# Altium PCB HS-IO TopBoard.PcbDoc
Units mm, origin at the board's own origin, x right, y up, seen from the top; angles counter-clockwise.
Board outline 158.83 x 62.32 mm, 6 copper layers (Top Layer, Int1 (GND), Int2 (Sign), Int3 (Sign), Int4 (PWR), Bottom Layer), stack 1.551 mm thick; 29 components, 22 nets, 112 pads, 34 vias.
Unrouted connection lines stored in the file: 38.
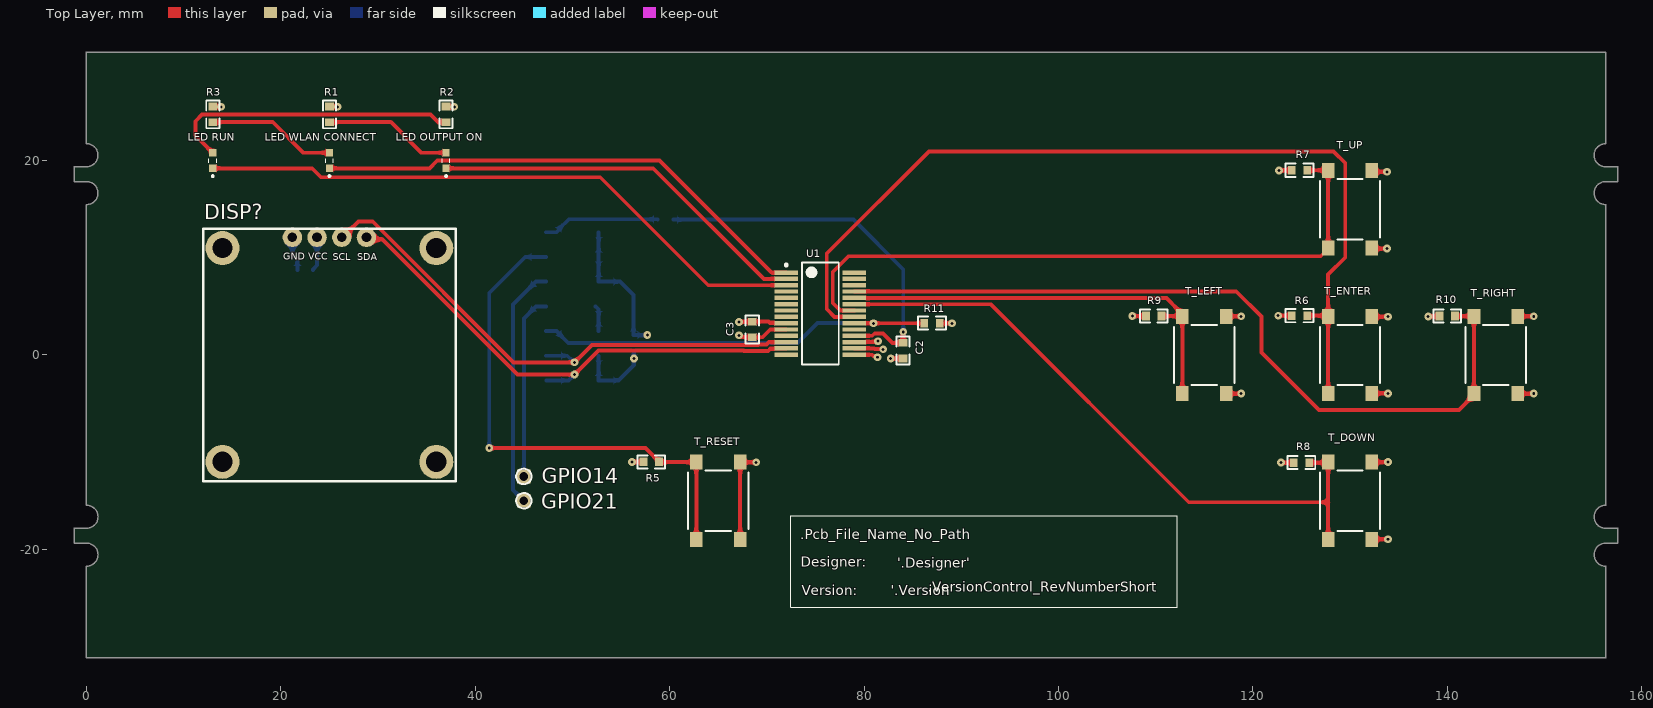
[diagram p0: Top Layer view]
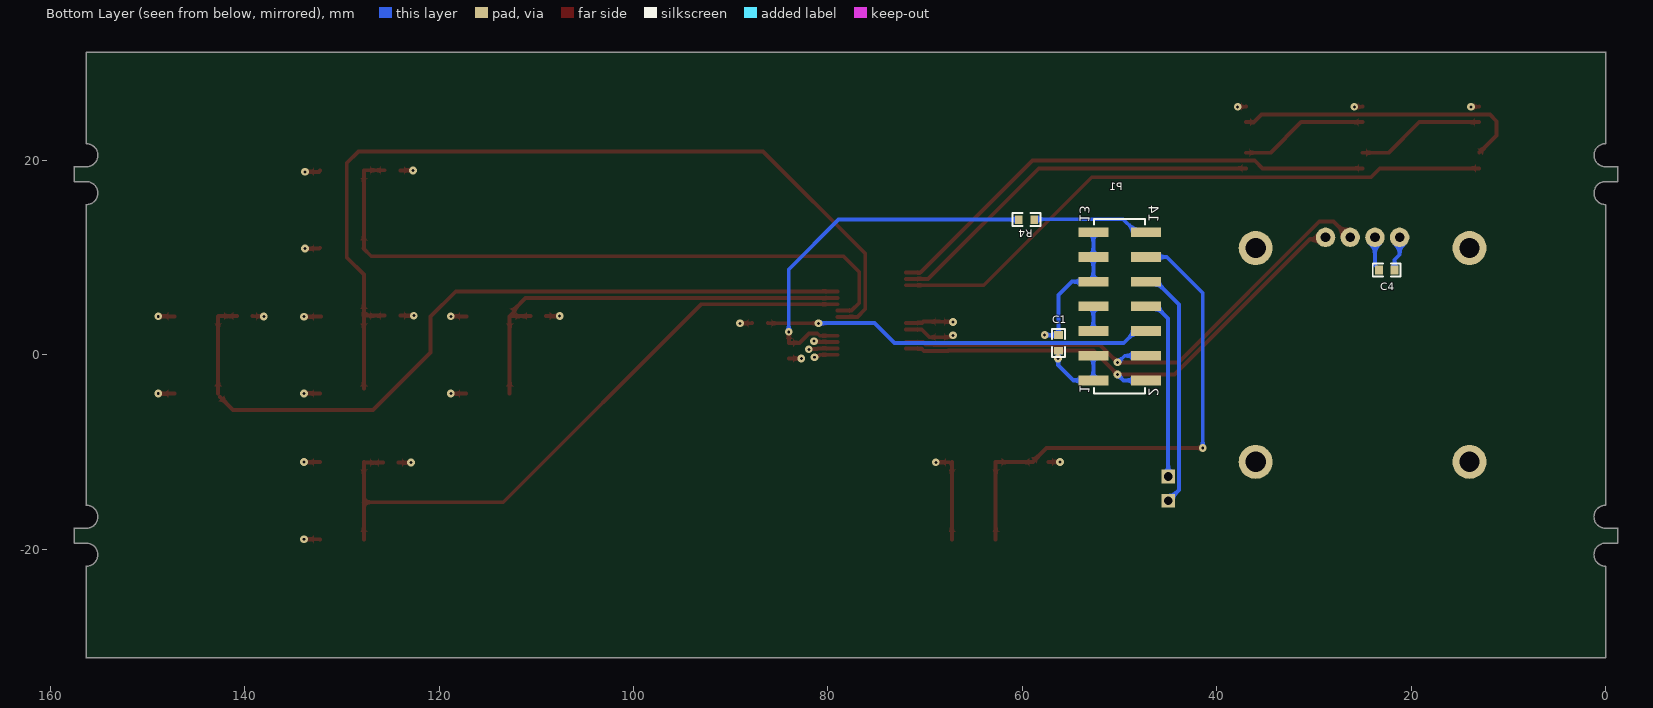
[diagram p1: Bottom Layer view, seen from below]
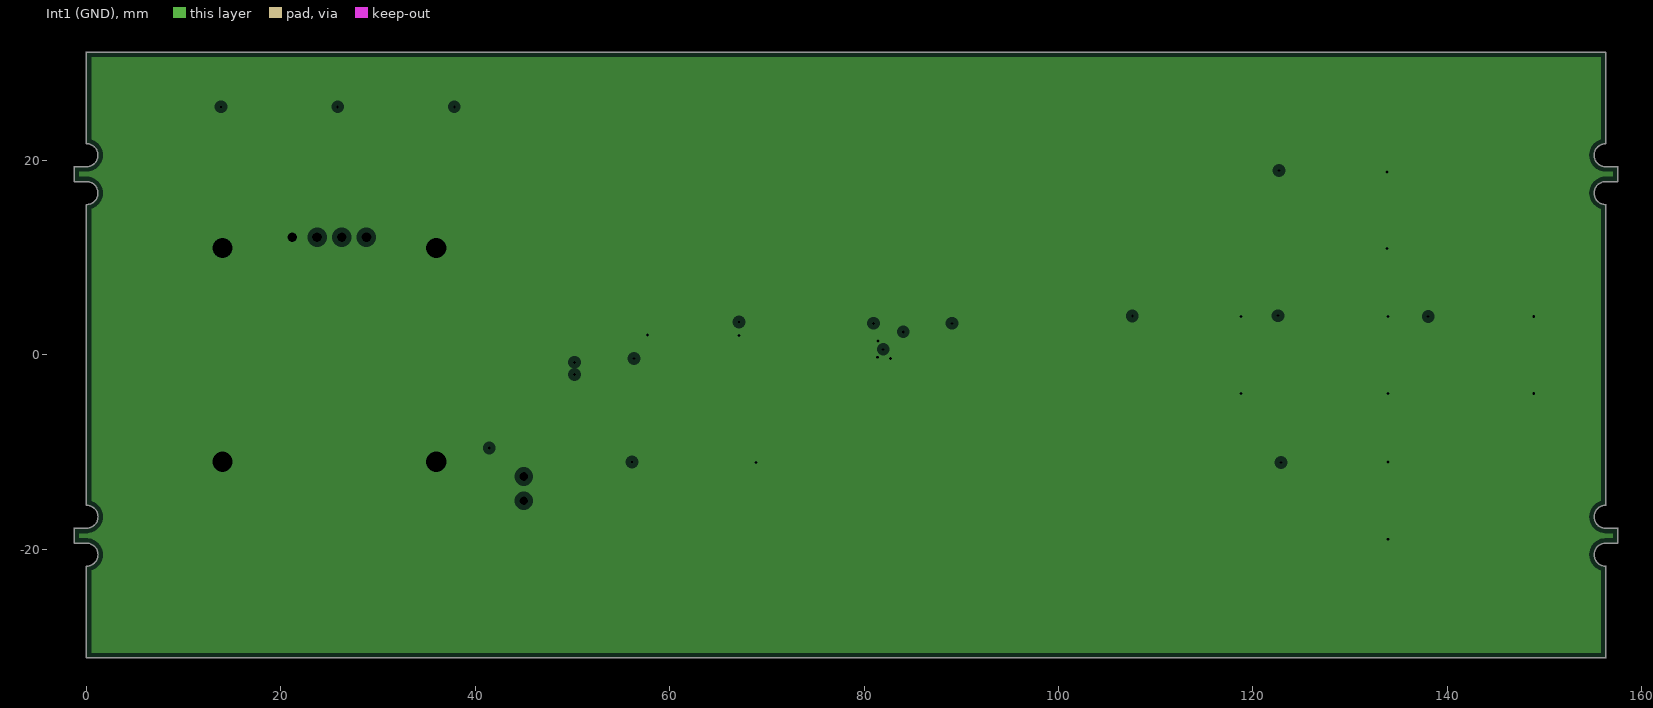
[diagram p2: Int1 (GND), clearances drawn from the general rule]
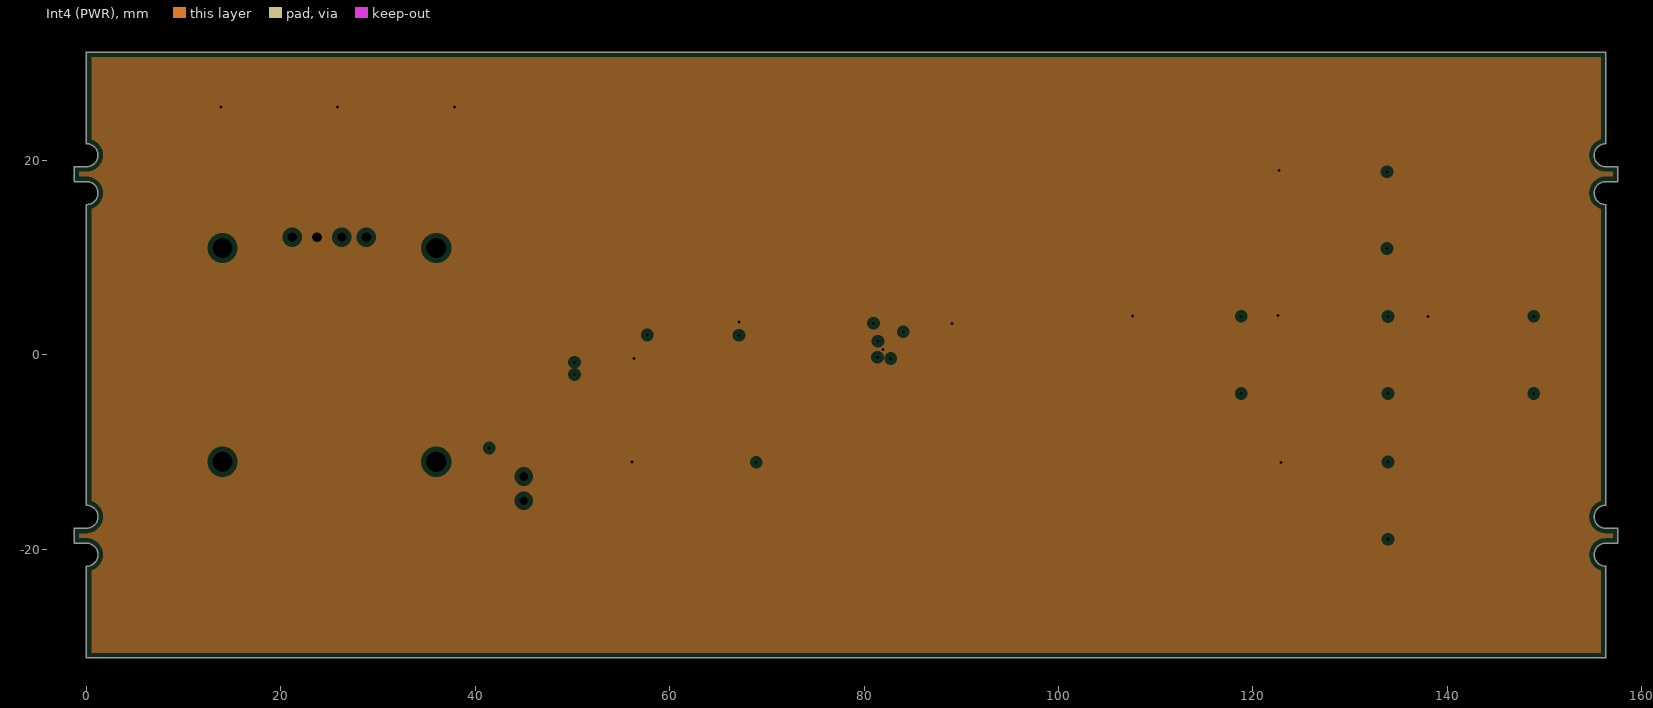
[diagram p3: Int4 (PWR), clearances drawn from the general rule]

## Layer stack, top to bottom
Top Solder: solder mask 0.0254, SM-001, Dk 4
Top Layer: signal copper 0.035
Dielectric 1: prepreg 0.0711, PP-006, Dk 4.1
Dielectric 2: prepreg 0.0711, PP-006, Dk 4.1
Int1 (GND): plane copper 0.035, net Gnd
Dielectric 3: core 0.4572, Core-035, Dk 4.7
Int2 (Sign): signal copper 0.035
Dielectric 4: prepreg 0.0711, PP-006, Dk 4.1
Dielectric 5: prepreg 0.0711, PP-006, Dk 4.1
Int3 (Sign): signal copper 0.035
Dielectric 6: core 0.4572, Core-035, Dk 4.7
Int4 (PWR): plane copper 0.035, net 3V3p
Dielectric 7: prepreg 0.0711, PP-006, Dk 4.1
Dielectric 8: prepreg 0.0711, PP-006, Dk 4.1
Bottom Layer: signal copper 0.035
Bottom Solder: solder mask 0.0254, SM-001, Dk 4

## Board outline
-1.262,-19.359 0.006,-19.359 cw(c0.006,-20.547) 1.194,-20.547 cw(c0.006,-20.547) 0.006,-21.735 0,-21.741 0,-31.158 0.011,-31.159 31.22,-31.159 31.225,-31.164 156.305,-31.164 156.311,-31.158 156.311,-21.743 156.304,-21.735 cw(c156.306,-20.547) 156.306,-19.359 157.556,-19.359 157.561,-19.352 157.561,-17.843 157.554,-17.835 156.306,-17.835 cw(c156.306,-16.647) 156.305,-15.459 156.311,-15.452 156.311,15.457 156.304,15.465 cw(c156.306,16.653) 156.306,17.841 157.556,17.841 157.561,17.848 157.561,19.357 157.554,19.365 156.306,19.365 cw(c156.306,20.553) 156.306,21.741 156.311,21.753 156.311,31.147 156.299,31.152 78.154,31.155 78.144,31.155 0.005,31.158 0,31.141 0,21.764 -0.001,21.741 cw(c-0.001,20.553) 1.187,20.553 cw(c-0.001,20.553) -0.001,19.365 -1.261,19.365 -1.268,19.36 -1.268,17.847 -1.262,17.841 -0.001,17.841 cw(c-0.001,16.653) 1.187,16.653 cw(c-0.001,16.653) -0.001,15.465 0,15.453 0,-15.447 0.006,-15.459 cw(c0.006,-16.647) 1.194,-16.647 cw(c0.006,-16.647) 0.006,-17.835 -1.261,-17.835 -1.268,-17.84

## Design rules (kind name [scope] priority, off if disabled: settings)
BoardOutlineClearance [All] p1: gap=2 ignorepadtopadclearanceinfootprint=FALSE
Clearance Small_Clearance [WithinRoom('J300_Small_Clearance')] p1: gap=0.12 ignorepadtopadclearanceinfootprint=FALSE
Clearance [All] p2: gap=0.2 ignorepadtopadclearanceinfootprint=TRUE except(0: SMDPad-Hole THPad-Hole Via-Hole Text-Hole; 0.3: Arc-Hole Track-Hole THPad-THPad THPad-Via THPad-Fill THPad-Poly THPad-Region THPad-Text Fill-Hole Poly-Hole Region-Hole)
Clearance "Clearance_Vias im Messpunkten zulassen" [(InComponent('3V3A') OR InComponent('3V3D') OR InComponent('GND') OR InComponent('UREF_I') OR InComponent('UREF_U') OR InComponent('5V')) vs IsVia] p3: gap=0 ignorepadtopadclearanceinfootprint=FALSE
Clearance "Clearance_Vias im Thermal-Pads von U1 (Concerto) zulassen" [IsVia vs InPadClass('Thermal Pads of U1 (Concerto)')] p4: gap=0 ignorepadtopadclearanceinfootprint=FALSE
Clearance "Clearance_Minimum Distance Via to Pad" [IsVia vs IsSMTPin] p5: gap=0 ignorepadtopadclearanceinfootprint=FALSE // to avoid solder wicking (Lötzinn darf nicht im Via-Bohrung abfließen)
ComponentClearance ComponentClearance_LCD-Folienleiter [(InComponent('LCD1000') AND InComponent('D200') AND InComponent('D200') AND InComponent('L200') AND InComponent('FB200') AND InComponent('FB201') AND InComponent('FB202') AND InComponent('C190') AND InComponent('U1900'))] p1: gap=-20 collisioncheckmode=3 verticalgap=0.254 showdistances=FALSE // Unter dem Foilenleiter der LCD platzierte Bauteile
ComponentClearance "ComponentClearance_Prozessor zu NetTies" [(InComponent('NT1') AND InComponent('NT2') AND InComponent('NT3')) vs InComponent('U400')] p2: gap=-20 collisioncheckmode=3 verticalgap=2540 showdistances=FALSE // Unter dem Prozessor sind drei NetTies platziert
ComponentClearance "ComponentClearance_Net Ties winzig NT4" [(InComponent('LCD1000') AND InComponent('U400') AND InComponent('NT1') AND InComponent('NT2') AND InComponent('NT3') AND InComponent('NT4'))] p3: gap=0 collisioncheckmode=3 verticalgap=2540 showdistances=FALSE // Net Ties dürfen unter Bauteilen platziert werden
ComponentClearance "ComponentClearance_Net Ties winzig NT4_C408" [(InComponent('NT4') AND InComponent('C408'))] p4: gap=0 collisioncheckmode=3 verticalgap=2540 showdistances=FALSE // Net Ties dürfen unter Bauteilen platziert werden
ComponentClearance [All] p5: gap=0.1 collisioncheckmode=3 verticalgap=0.254 showdistances=FALSE
DiffPairsRouting [All] p1: maxlimit=0.3 minlimit=0.2 mostfreqgap=0.2 toplayer_minwidth=0.2 toplayer_maxwidth=0.3 toplayer_prefwidth=0.2 midlayer1_minwidth=0.2 midlayer1_maxwidth=0.3 midlayer1_prefwidth=0.2 midlayer2_minwidth=0.2 midlayer2_maxwidth=0.3 midlayer2_prefwidth=0.2 bottomlayer_minwidth=0.2 bottomlayer_maxwidth=0.3 bottomlayer_prefwidth=0.2 maxuncoupledlength=12.7
Height [All] p1: minheight=0 maxheight=20 prefheight=12.7
HoleSize Via_HoleSize [IsVia] p1: absolutevalues=TRUE maxlimit=0.6 minlimit=0.2 maxpercent=80.000 minpercent=20.000
HoleSize [All] p2: absolutevalues=TRUE maxlimit=5 minlimit=0.3 maxpercent=80.000 minpercent=20.000
MatchedLengths "MatchedLengths SD Card" [(InNet('SD CLK') OR InNet('SD D0') OR InNet('SD D1') OR InNet('SD D2') OR InNet('SD D3'))] p1: tolerance=5 checknetsindiffpair=FALSE checkdiffpairvsdiffpair=TRUE checkxsignals=TRUE checkothers=TRUE
MinimumSolderMaskSliver "MinimumSolderMaskSliver_FRAKO Logos" [(InComponent('Logo1') OR InComponent('Logo2'))] p1: minsoldermaskwidth=0 // Meldungen innerhalb der FRAKO-Logos unterdrücken
MinimumSolderMaskSliver MinimumSolderMaskSliver_U100 [InComponent('U100')] p2: minsoldermaskwidth=0.12 // Lötstoppmaske an U100: kleineren Wert zulassen
MinimumSolderMaskSliver MinimumSolderMaskSliver_U1 [InComponent('U1')] p3: minsoldermaskwidth=0.045 // Lötstoppmaske an U1: kleineren Wert zulassen
MinimumSolderMaskSliver MinimumSolderMaskSliver_U402 [InComponent('U402')] p4: minsoldermaskwidth=0.1 // Lötstoppmaske an U402: kleineren Wert zulassen
MinimumSolderMaskSliver [All] p5: minsoldermaskwidth=0.05
PlaneClearance [All] p1: clearance=0.508
PlaneConnect [All] p1: pad.planeconnectstyle=Relief pad.reliefexpansion=0.508 pad.reliefentries=4 pad.reliefconductorwidth=0.5 pad.reliefairgap=0.254 via.planeconnectstyle=Direct via.reliefexpansion=0.508 via.reliefentries=4 via.reliefconductorwidth=0.254 via.reliefairgap=0.254
PolygonConnect [All] p1: thpad.connectstyle=Relief thpad.reliefconductorwidth=0.254 thpad.reliefentries=4 thpad.polygonreliefangle="90 Angle" thpad.airgapwidth=0.254 smdpad.connectstyle=Relief smdpad.reliefconductorwidth=0.254 smdpad.reliefentries=4 smdpad.polygonreliefangle="90 Angle" smdpad.airgapwidth=0.254 via.connectstyle=Direct via.reliefconductorwidth=0.254 via.reliefentries=4 via.polygonreliefangle="90 Angle" via.airgapwidth=0.254
RoutingVias [All] p1: holewidth=0.3 width=0.6 viastyle="Through Hole" minholewidth=0.2 minwidth=0.5 maxholewidth=2 maxwidth=3.5
SilkToSilkClearance [All] p1: silktosilkclearance=0.1
SilkToSolderMaskClearance [IsPad] p1: minsilkscreentomaskgap=0 clearancetoexposedcopper=TRUE
SolderMaskExpansion [All] p1: expansion=0.102 istentingtop=FALSE
SupplyNets "Schematic Supply Nets_5" [InNet('12V')] p1: voltage=0.000
SupplyNets "Schematic Supply Nets_3" [InNet('3V3p')] p2: voltage=0.000
SupplyNets "Schematic Supply Nets_1" [InNet('GND')] p3: voltage=0.000
UnRoutedNet [All] p1: checkbadconnections=TRUE
Width [All] p1: maxlimit=3 minlimit=0.4 preferedwidth=0.4 minimp=50.000000 maximp=50.000000 favimp=50.000000
20 further rules are at their usual default settings.

## Components (designator, comment, footprint, x,y, rotation, side; value= is the part's Value field where it differs from the comment)
C1 "100n" CC1608-0603 56.286,1.241 r270 bottom
C2 "100n" CC1608-0603 84,0.447 r90 top
C3 "100n" CC1608-0603 68.503,2.622 r90 top
C4 "100n" CC1608-0603 22.503,8.747 r0 bottom
DISP? "JMD0.96-1" JMD0.96-1-Footprint-1 25,0 r0 top
GPIO14 "(no part)" TESTPOINT 45,-12.5 r90 top
GPIO21 "(no part)" TESTPOINT 45,-15 r90 top
"LED OUTPUT ON" "150060YS55040" LED_0603_Standard 37.003,19.997 r90 top locked
"LED RUN" "150060GS55040" LED_0603_Standard 13.003,19.997 r90 top locked
"LED WLAN CONNECT" "150060RS55040" LED_0603_Standard 25.003,19.997 r90 top locked
P1 "61031421121" 61031421121 50,5 r90 bottom locked
R1 "s0603_715_1%" CC1608-0603 25.003,24.747 r90 top
R2 "s0603_8k66_1%" CC1608-0603 37.003,24.747 r90 top
R3 "S0603_931_1%" CC1608-0603 13.003,24.747 r90 top
R4 "1k0" CR1608-0603 59.575,13.92 r180 bottom
R5 "4k7" CR1608-0603 58.113,-11 r180 top
R6 "4k7" CR1608-0603 124.8,4.041 r180 top
R7 "4k7" CR1608-0603 124.8,19 r180 top
R8 "4k7" CR1608-0603 125,-11.078 r180 top
R9 "4k7" CR1608-0603 109.8,4 r180 top
R10 "4k7" CR1608-0603 140,4 r180 top
R11 "4k7" CR1608-0603 87,3.272 r0 top
T_DOWN "430182050816" 430182050816 130,-15 r90 top locked
T_ENTER "430182050816" 430182050816 130,0 r90 top locked
T_LEFT "430182050816" 430182050816 115,0 r90 top locked
T_RESET "430182050816" 430182050816 65,-15 r90 top locked
T_RIGHT "430182050816" 430182050816 145,0 r90 top locked
T_UP "430182050816" 430182050816 130,15 r90 top locked
U1 "MCP23017-E/SS" SSOP-SS28_M 75.503,4.247 r0 top

## Footprints (in the part's own frame and the unit in brackets; to place one, negate y for a bottom-side part, rotate by r counter-clockwise, add the part's x,y. Pads: shape width x height; smd on the part's side, far side on the other; paste and mask are expansions set on the pad)
61031421121 [mm] "Pin Header, pitch 2.54 mm, SMD, Vertical, dual row, 14p"
  rect 1x3.1 smd: 1(-7.62,2.7) 2(-7.62,-2.7) 3(-5.08,2.7) 4(-5.08,-2.7) 5(-2.54,2.7) 6(-2.54,-2.7) 7(0,2.7) 8(0,-2.7) 9(2.54,2.7) 10(2.54,-2.7) 11(5.08,2.7) 12(5.08,-2.7) 13(7.62,2.7) 14(7.62,-2.7)
  silkscreen extent -8.96,-2.62 8.96,2.62, body extent -8.89,-3.75 8.89,3.75, height 9.62
430182050816 [mm] "SMD Tact Switch, body 6x6mm"
  rect 1.55x1.3 smd: 1(-3.975,2.25) 2(-3.975,-2.25) 3(3.975,2.25) 4(3.975,-2.25)
  silkscreen extent -3.1,-3.1 3.1,3.1, body extent -4.5,-3.1 4.5,3.1, height 5
CC1608-0603 [mm]
  rect 0.8x0.9 smd: 1(-0.8,0) 2(0.8,0)
  silkscreen extent -1.43,-0.68 1.45,0.67, body extent -0.8,-0.4 0.8,0.4, height 1
CR1608-0603 [mm]
  rect 0.8x0.9 smd: 1(-0.8,0) 2(0.8,0)
  silkscreen extent -1.43,-0.67 1.43,0.67, body extent -0.8,-0.4 0.8,0.4, height 1
JMD0.96-1-Footprint-1 [mm]
  round 2 hole 1 paste-2539.97: 1(-3.81,12.1) 2(-1.27,12.1) 3(1.27,12.1) 4(3.81,12.1)
  round 3.5 hole 2.1 paste-2539.97: A(-11,11) B(-11,-11) C(11,-11) D(11,11)
  silkscreen extent -13,-13 13,13, body extent -13.1,-13.1 13.1,13.1, height 4.7
LED_0603_Standard [mm]
  rect 0.8x0.75 smd: 1(-0.8,0) 2(0.8,0)
  silkscreen extent -1.7,-0.4 0.2,0.4, body extent -0.8,-0.4 0.8,0.4, height 0.4
SSOP-SS28_M [mm] "SOP, 28-Leads, Body 10.2x5.2mm, Pitch 0.65mm, IPC Low Density"
  rect 2.4x0.45 smd: 1(-3.5,4.225) 2(-3.5,3.575) 3(-3.5,2.925) 4(-3.5,2.275) 5(-3.5,1.625) 6(-3.5,0.975) 7(-3.5,0.325) 8(-3.5,-0.325) 9(-3.5,-0.975) 10(-3.5,-1.625) 11(-3.5,-2.275) 12(-3.5,-2.925) 13(-3.5,-3.575) 14(-3.5,-4.225) 15(3.5,-4.225) 16(3.5,-3.575) 17(3.5,-2.925) 18(3.5,-2.275) 19(3.5,-1.625) 20(3.5,-0.975) 21(3.5,-0.325) 22(3.5,0.325) 23(3.5,0.975) 24(3.5,1.625) 25(3.5,2.275) 26(3.5,2.925) 27(3.5,3.575) 28(3.5,4.225)
  silkscreen extent -3.62,-5.25 1.9,5.25, body extent -2.8,-5.25 2.8,5.25, height 2
TESTPOINT [mm]
  rect 1.4x1.4 hole 0.9: 1(0,0)
  silkscreen extent -0.8,-0.8 0.8,0.8, body extent -0.8,-0.8 0.8,0.8

## Part data
C1 C2 C3 C4: library part CMP-018-000010-5, "SMD0603, X7R, 15%, 50V, 100nF", Manufacturer=KEMET, Manufacturer Part Number=C0603C104K5RAC7867, checked=checked, ComponentLink1Description="Manufacturer Link", ComponentLink1URL=https://www.kemet.com, ComponentLink2Description=Datasheet, ComponentLink2URL=https://www.mouser.de/datasheet/2/447/KEM_C1002_X7R_SMD-3316098.pdf, Design Item ID=SMD_0603_100n_1, E01_Value_1=100n, E08_Description="SMD0603, X7R, 15%, 50V, 100nF", Kommentar="Kondensator aus mehreren Keramikschichten MLCC - SMD/SMT 50V 0.1uF X7R 0603 10%", Supplier=Mouser, Supplier Order Number=80-C0603C104K5R7867, Supplier Price 100pcs="0,022 €"
DISP?: library part CMP-00002-3, "Monochrome 0.96\" 128x64 I2C OLED Display (Breakout)", Supplier=Mouser
GPIO14 GPIO21: library part CMP-029-000001-1, "Test Point", checked=checked, Design Item ID=TESTPUNKT_1, E01_Value_1="(no part)", Kommentar="(no part)", Manufacturer="(no part)", Manufacturer Part Number="(no part)", Supplier=Mouser, Supplier Order Number="(no part)", Supplier Price 100pcs="(no part)"
"LED OUTPUT ON": library part CMP-071-000002-1, "LED yellow 0603", Manufacturer="Würth Elektronik", Datasheet Link=http://katalog.we-online.de/led/datasheet/150060YS55040.pdf, Design Item ID=150060YS55040, Manufacturer Part Number=150060YS55040, Supplier=Mouser, Supplier Order Number=710-150060YS55040, Supplier Price 100pcs=0,13€
"LED RUN": library part CMP-071-000000-1, "LED green 0603", Manufacturer="Wurth Elektronik", Datasheet Link=http://katalog.we-online.de/led/datasheet/150060RS55040.pdf, Design Item ID=150060GS55040, Manufacturer Part Number=150060GS55040, Supplier=Mouser, Supplier Order Number=710-150060GS55040, Supplier Price 100pcs=0,13€
"LED WLAN CONNECT": library part CMP-071-000001-1, "LED red 0603", Manufacturer="Würth Elektronik", Datasheet Link=http://katalog.we-online.de/led/datasheet/150060RS55040.pdf, Design Item ID=150060RS55040, Manufacturer Part Number=150060RS55040, Supplier=Mouser, Supplier Order Number=710-150060RS55040, Supplier Price 100pcs=0,13€
P1: library part CMP-067-000001-1, "WR-PHD Pin Header, SMT, pitch 2.54mm, Dual Row, Vertical, 14p", Manufacturer="Wurth Elektronik", Datasheet Link=https://www.we-online.com/catalog/datasheet/61031421121.pdf, Design Item ID=61031421121, Manufacturer Part Number=61031421121, Supplier=Mouser, Supplier Order Number=710-61031421121
R1: library part CMP-073-000001-7, "Resistor 715R 1% 0603", E01_Value_1=715, Manufacturer="Vishay / Dale", Manufacturer Part Number=CRCW0603715RFKEA, ComponentLink1Description=Datasheet, ComponentLink1URL=https://www.vishay.com/doc?20035, ComponentLink2Description="Manufacturer link", ComponentLink2URL=https://www.vishay.com/, Design Item ID=s0603_715_1%, Supplier=Mouser, Supplier Order Number=71-CRCW0603-715-E3
R2: library part CMP-073-000002-7, "Resistor 8k66 1% 0603", E01_Value_1=8k66, Manufacturer="Vishay / Dale", Manufacturer Part Number=CRCW06038K66FKEA, ComponentLink1Description=Datasheet, ComponentLink1URL=https://www.vishay.com/doc?20035, ComponentLink2Description=Manufacturer, ComponentLink2URL=https://www.vishay.com/, Design Item ID=s0603_8k66_1%, Supplier=Mouser, Supplier Order Number=71-CRCW0603-8.66K-E3
R3: library part CMP-073-000000-7, "Resistor 931R 1% 0603", E01_Value_1=931R, Manufacturer="Vishay / Dale", Manufacturer Part Number=CRCW0603931RFKEA, ComponentLink1Description=Datasheet, ComponentLink1URL=https://www.vishay.com/doc?20035, ComponentLink2Description="Manufakturer Link", ComponentLink2URL=https://www.vishay.com/, Design Item ID=S0603_931_1%, Supplier=Mouser, Supplier Order Number=71-CRCW0603-931-E3, Supplier Price 100 Pcs="0,009 €"
R4: library part S0603_1k0_1_1, "SMD0603, 0.1W, TK100, 1%, 1,0k, Metallfilm", Manufacturer="Vishay / Dale", Manufacturer Part Number=CRCW06031K00FKEAC, ComponentLink1Description="Manufacturer Link", ComponentLink1URL=https://www.vishay.com/, ComponentLink2Description=Datasheet, ComponentLink2URL=https://www.vishay.com/docs/20035/dcrcwe3.pdf, E01_Value_1=1k0, E08_Description="SMD0603, 0.1W, TK100, 1%, 1,0k, Metallfilm", Kommentar="Dickfilmwiderstände - SMD 1/10Watt 1Kohms 1% Commercial Use", Supplier=Mouser, Supplier Order Number=71-CRCW06031K00FKEAC, Supplier Price 100pcs="0,007 €"
R5 R6 R7 R8 R9 R10 R11: library part CMP-027-000017-2, "SMD0603, 0.1W, TK100, 1%, 4,7k, Metallfilm", Manufacturer="Vishay / Dale", Manufacturer Part Number=CRCW06034K70FKEAC, checked=checked, ComponentLink1Description="Manufacturer Link", ComponentLink1URL=https://www.vishay.com/, ComponentLink2Description=Datasheet, ComponentLink2URL=https://www.vishay.com/docs/20035/dcrcwe3.pdf, Design Item ID=S0603_4k7_1, E01_Value_1=4k7, E08_Description="SMD0603, 0.1W, TK100, 1%, 4,7k, Metallfilm", Kommentar="Dickfilmwiderstände - SMD 1/10Watt 4.7Kohms 1% Commercial Use", Supplier=Mouser, Supplier Order Number=71-CRCW06034K70FKEAC, Supplier Price 100pcs="0,007 €"
T_DOWN T_ENTER T_LEFT T_RESET T_RIGHT T_UP: library part CMP-074-000000-1, "WS-TASV SMT Tact Switch, 6x6x5mm, 160gf", Manufacturer="Wurth Elektronik", Datasheet Link=https://www.we-online.com/catalog/datasheet/430182050816.pdf, Design Item ID=430182050816, Manufacturer Part Number=430182050816, Supplier=Mouser, Supplier Order Number=710-430182050816
U1: library part CMP-015-000011-1, "16-Bit I/O Expander with Serial Interface, 28-Pin SSOP, Extended Temperature", Manufacturer=Microchip, ComponentLink1Description="Manufacturer Link", ComponentLink1URL=http://www.microchip.com/, ComponentLink2Description=Datasheet, ComponentLink2URL=http://ww1.microchip.com/downloads/en/DeviceDoc/21952b.pdf, Design Item ID=CMP-0186-00176-2, E01_Value_1=MCP23017-E/SS, Kommentar="Schnittstelle - I/O-Erweiterer 16bit Input/Output Exp I2C interface", Manufacturer Part Number=MCP23017-E/SS, Supplier=Mouser, Supplier Order Number=579-MCP23017-E/SS, Supplier Price 100pcs=1,19€

## Via types
v1: diameter 0.8, hole 0.3, Top Layer to Bottom Layer, 34 vias

## Nets (pads, with @x,y where several pads share a name; then routed paths per layer and width w, separated by ;. In a path a pad name is that pad's centre, name@x,y a point inside that pad or via, vN(x,y) a via of type N, cw(c..) or ccw(c..) an arc to the next point about the centre after c; other vN are vias at no path point)
3V3p: C1.2 C3.2 C4.2 DISP?.2 P1.1 P1.3 R1.2 R2.2 R3.2 R5.2 R6.2 R7.2 R8.2 R9.2 R10.2 R11.2 U1.9 U1.16 | length 31.3
  Top Layer w0.4: R3.2 13.012,25.537 13.843,25.537 v1(13.853,25.528) ; R1.2 25.012,25.537 25.843,25.537 v1(25.853,25.528) ; R2.2 37.012,25.537 37.843,25.537 v1(37.853,25.528) ; v1(56.144,-11.019) 56.153,-11.01 57.304,-11.01 R5.2 ; v1(67.144,3.403) 67.153,3.412 68.493,3.412 C3.2 70.203,3.422 70.328,3.297 71.978,3.297 U1.9 ; U1.16 81.05,0.672 81.102,0.62 81.93,0.62 v1(81.972,0.577) ; R11.2 87.81,3.262 89.034,3.262 v1(89.044,3.253) ; v1(107.605,4) R9.2 ; v1(122.605,4.042) R6.2 ; v1(122.705,18.975) 122.718,18.987 123.988,18.987 R7.2 ; v1(122.905,-11.078) R8.2 ; v1(138.044,3.956) 138.066,3.978 139.178,3.978 R10.2
  Bottom Layer w0.4: C4.2 23.303,8.797 23.733,9.227 DISP?.2@23.733,12.007 ; P1.1 54.744,-2.62 56.32,-1.044 56.32,-0.382 v1(56.324,-0.378) 56.305,-0.358 56.305,0.422 C1.2 ; P1.1@52.703,-2.623 P1.3@52.703,-0.083
12V: P1.5 P1.7 | length 2.7
  Bottom Layer w0.4: P1.7@52.35,4.997 52.403,4.997 52.7,4.7 P1.5
Gnd: C1.1 C2.1 C3.1 C4.1 DISP?.1 DISP?.A DISP?.B DISP?.C DISP?.D P1.9 P1.11 P1.13 T_DOWN.2 T_DOWN.4 T_ENTER.2 T_ENTER.4 T_LEFT.2 T_LEFT.4 T_RESET.2 T_RESET.4 T_RIGHT.2 T_RIGHT.4 T_UP.2 T_UP.4 U1.10 U1.15 U1.17 | length 55.9
  Top Layer w0.4: v1(67.144,2.022) 67.156,2.022 67.357,1.822 69.553,1.822 70.353,2.622 U1.10 ; T_RESET.2 T_RESET.4@67.25,-11.314 ; T_RESET.4 T_RESET.4@67.25,-11.314 ; v1(68.905,-11.044) 67.52,-11.044 T_RESET.4@67.25,-11.314 ; U1.15 80.803,0.022 80.951,-0.126 81.283,-0.126 v1(81.396,-0.24) ; U1.17 79.028,1.347 81.361,1.347 v1(81.433,1.42) ; v1(82.744,-0.378) 82.756,-0.365 83.988,-0.365 C2.1 ; T_LEFT.4@117.176,3.975 v1(118.805,3.975) ; T_LEFT.2 117.253,-3.978 v1(118.805,-3.978) ; T_ENTER.4@132.16,3.956 132.174,3.942 v1(133.905,3.942) ; T_DOWN.2 132.267,-18.958 v1(133.905,-18.958) ; T_DOWN.4 v1(133.905,-11.025) ; T_ENTER.2 132.267,-3.958 v1(133.905,-3.958) ; T_UP.2 132.333,10.942 v1(133.805,10.942) ; T_UP.4 132.383,18.842 v1(133.805,18.842) ; T_RIGHT.2 v1(148.905,-3.975) ; T_RIGHT.4 v1(148.905,3.975)
  Bottom Layer w0.4: DISP?.1@21.193,12.007 21.193,10.307 21.703,9.797 C4.1 ; P1.9 P1.11 P1.13 ; P1.9@52.703,7.537 54.91,7.537 56.286,6.161 C1.1 v1(57.705,2.042)
GPIO13: P1.6 R11.1 U1.20 | length 42.3
  Top Layer w0.4: U1.20 79.012,3.262 80.972,3.262 v1(80.982,3.253) 80.991,3.262 86.19,3.262 R11.1
  Bottom Layer w0.4: P1.6 48.35,2.46 49.569,1.242 55.67,1.242 64.406,1.242 64.426,1.222 73.162,1.222 75.211,3.272 80.962,3.272 v1(80.982,3.253)
GPIO14: GPIO14.1 P1.8 | length 19.1
  Bottom Layer w0.4: GPIO14.1 45,3.75 46.25,5 P1.8
GPIO21: GPIO21.1 P1.10 | length 25
  Bottom Layer w0.4: GPIO21.1 43.9,-13.9 43.9,5.19 46.25,7.54 P1.10
"I2C SCL": DISP?.3 P1.4 U1.12 | length 56.5
  Top Layer w0.4: DISP?.3@26.273,12.007 28.007,13.742 29.454,13.742 43.954,-0.758 v1(50.205,-0.758) 52.005,1.042 67.868,1.042 67.887,1.022 69.119,1.022 69.169,1.072 69.953,1.072 70.203,1.322 U1.12
  Bottom Layer w0.4: P1.4 49.47,-0.08 50.148,-0.758 v1(50.205,-0.758)
"I2C SDA": DISP?.4 P1.2 U1.13 | length 53.3
  Top Layer w0.4: DISP?.4@28.813,12.007 28.934,11.886 30.461,11.886 44.367,-2.02 v1(50.205,-2.02) 52.667,0.442 67.619,0.442 67.639,0.422 70.151,0.422 70.376,0.647 71.978,0.647 U1.13
  Bottom Layer w0.4: P1.2@47.303,-2.623 49.602,-2.623 v1(50.205,-2.02)
I2C_R\E\S\E\T\: C2.2 R4.1 U1.18 | length 38.9
  Top Layer w0.4: U1.18 80.851,1.972 81.099,2.22 81.947,2.22 82.92,1.247 C2.2 84.019,1.266 84.019,2.359 v1(84.038,2.378)
  Bottom Layer w0.4: R4.1 78.909,13.92 84.038,8.791 v1(84.038,2.378)
"LED GREEN": "LED RUN.1" U1.3 | length 64
  Top Layer w0.4: 13.003,19.197 23.229,19.197 24.14,18.285 52.86,18.285 63.973,7.172 U1.3
"LED RED": "LED WLAN CONNECT.1" U1.1 | length 52.1
  Top Layer w0.4: 25.003,19.197 35.299,19.197 36.099,19.997 58.977,19.997 70.502,8.472 U1.1
"LED YELLOW": "LED OUTPUT ON.1" U1.2 | length 39.7
  Top Layer w0.4: 37.003,19.197 58.316,19.197 69.691,7.822 U1.2
"NetLED OUTPUT ON_2": "LED OUTPUT ON.2" R1.1 | length 13.3
  Top Layer w0.4: R1.1 31.316,23.947 34.466,20.797 37.003,20.797
"NetLED RUN_2": "LED RUN.2" R2.1 | length 30.4
  Top Layer w0.4: 13.003,20.797 13.003,20.822 12.828,20.997 12.803,20.997 11.205,22.594 11.205,24.042 11.911,24.747 13.619,24.747 13.638,24.728 19.619,24.728 19.638,24.747 25.619,24.747 25.638,24.728 35.386,24.728 36.167,23.947 R2.1
"NetLED WLAN CONNECT_2": "LED WLAN CONNECT.2" R3.1 | length 13.3
  Top Layer w0.4: R3.1 19.172,23.947 22.322,20.797 25.003,20.797
RESET_PERIPHERIE: P1.14 R4.2 | length 12.1
  Bottom Layer w0.4: P1.14 48.35,12.62 48.65,12.92 48.65,12.986 49.629,13.965 58.73,13.965 R4.2
"TASTER DOWN": R8.1 T_DOWN.1 T_DOWN.3 U1.23 | length 67
  Top Layer w0.4: U1.23 93.025,5.222 113.405,-15.158 127.75,-15.158 ; R8.1 T_DOWN.3@127.697,-11.078 ; T_DOWN.1 127.75,-15.158 ; T_DOWN.3 127.75,-15.158
"TASTER ENTER": R6.1 T_ENTER.1 T_ENTER.3 U1.21 | length 93.9
  Top Layer w0.4: U1.21 76.969,3.922 76.17,4.722 76.17,10.437 86.675,20.942 128.305,20.942 129.505,19.742 129.505,10.042 127.75,8.286 T_ENTER.3@127.75,4.372 ; R6.1 127.816,4.042 127.783,4.339 T_ENTER.3@127.75,4.372 ; 127.089,3.975 T_ENTER.3@127.75,4.372 ; T_ENTER.1@127.75,-3.468 T_ENTER.3
"TASTER LEFT": R9.1 T_LEFT.1 T_LEFT.3 U1.24 | length 44.8
  Top Layer w0.4: U1.24 79.028,5.847 111.1,5.847 112.3,4.647 112.3,4.425 T_LEFT.3 ; R9.1 112.725,4 T_LEFT.3 ; T_LEFT.1 T_LEFT.3
"TASTER RESET": P1.12 R5.1 T_RESET.1 T_RESET.3 | length 53.2
  Top Layer w0.4: v1(41.444,-9.578) 41.449,-9.572 57.535,-9.572 58.913,-10.95 58.913,-11.025 T_RESET.3 T_RESET.1
  Bottom Layer w0.4: v1(41.444,-9.578) 41.444,6.368 45.153,10.077 P1.12@47.303,10.077
"TASTER RIGHT": R10.1 T_RIGHT.1 T_RIGHT.3 U1.25 | length 81.2
  Top Layer w0.4: U1.25 79.028,6.547 118.3,6.547 120.881,3.966 120.881,0.266 126.805,-5.658 141.205,-5.658 142.3,-4.564 142.3,-4.55 142.539,-4.311 T_RIGHT.1@142.553,-4.311 ; R10.1 T_RIGHT.3@142.725,4 ; T_RIGHT.1 T_RIGHT.3
"TASTER UP": R7.1 T_UP.1 T_UP.3 U1.22 | length 67.9
  Top Layer w0.4: U1.22 77.564,4.572 76.779,5.357 76.779,8.532 78.405,10.157 126.988,10.157 T_UP.1@127.803,10.972 ; R7.1 127.725,19 T_UP.3 T_UP.1
pads on no net: U1.4 U1.5 U1.6 U1.7 U1.8 U1.11 U1.14 U1.19 U1.26 U1.27 U1.28

## Polygon pours and split planes (outlines as drawn)
Gnd on Int1 (GND) (split plane): 276 vertices, not listed, extent -0.757,-30.653 157.05,30.648
3V3p on Int4 (PWR) (split plane): 276 vertices, not listed, extent -0.757,-30.653 157.05,30.648

## Silkscreen, mask and mechanical layers (free items; w line width, h text height)
Top Overlay:
  lines w0.1: 72.482,-25.958 112.205,-25.958 112.205,-16.535 72.482,-16.535 72.482,-25.958
  text ".Pcb_File_Name_No_Path" at 73.442,-18.975 h1
  text "Designer:" at 73.507,-21.775 h1
  text "'.Designer'" at 83.408,-21.875 h1
  text ".VersionControl_RevNumberShort" at 86.555,-24.375 h1
  text "Version:" at 73.607,-24.708 h1
  text "'.Version'" at 82.739,-24.708 h1
M1 Board Shape:
  lines w0.01: -0.001,15.459 ccw(c-0.001,16.653) -0.001,17.847 ; -0.001,19.359 ccw(c-0.001,20.553) -0.001,21.747 ; 0.006,-21.741 ccw(c0.006,-20.547) 0.006,-19.353 ; 0.006,-17.841 ccw(c0.006,-16.647) 0.006,-15.453 ; 156.306,-21.741 cw(c156.306,-20.547) 156.306,-19.353 ; 156.306,-17.841 cw(c156.306,-16.647) 156.306,-15.453 ; 156.306,15.459 cw(c156.306,16.653) 156.306,17.847 ; 156.306,19.359 cw(c156.306,20.553) 156.306,21.747
M11 Measure:
  lines w0.1: 0,0 156.306,0.001

## Text inside footprints (layer, text, board x,y; h text height)
DISP?: Top Overlay "GND" at 20.254,9.781 h0.7; Top Overlay "VCC" at 22.818,9.796 h0.7; Top Overlay "SCL" at 25.321,9.765 h0.7; Top Overlay "SDA" at 27.886,9.75 h0.7; M1 Board Shape "Display 128x64" at 15.128,3.19 h1.5
P1: Bottom Overlay "14" at 47,13.65 h1.02 r90; Bottom Overlay "13" at 54.1,13.626 h1.02 r90; Bottom Overlay "1" at 54.1,-3.974 h1.02 r90; Bottom Overlay "2" at 47,-4.25 h1.02 r90